# Allegro board COMPLETE SCHEMATIC V1.brd
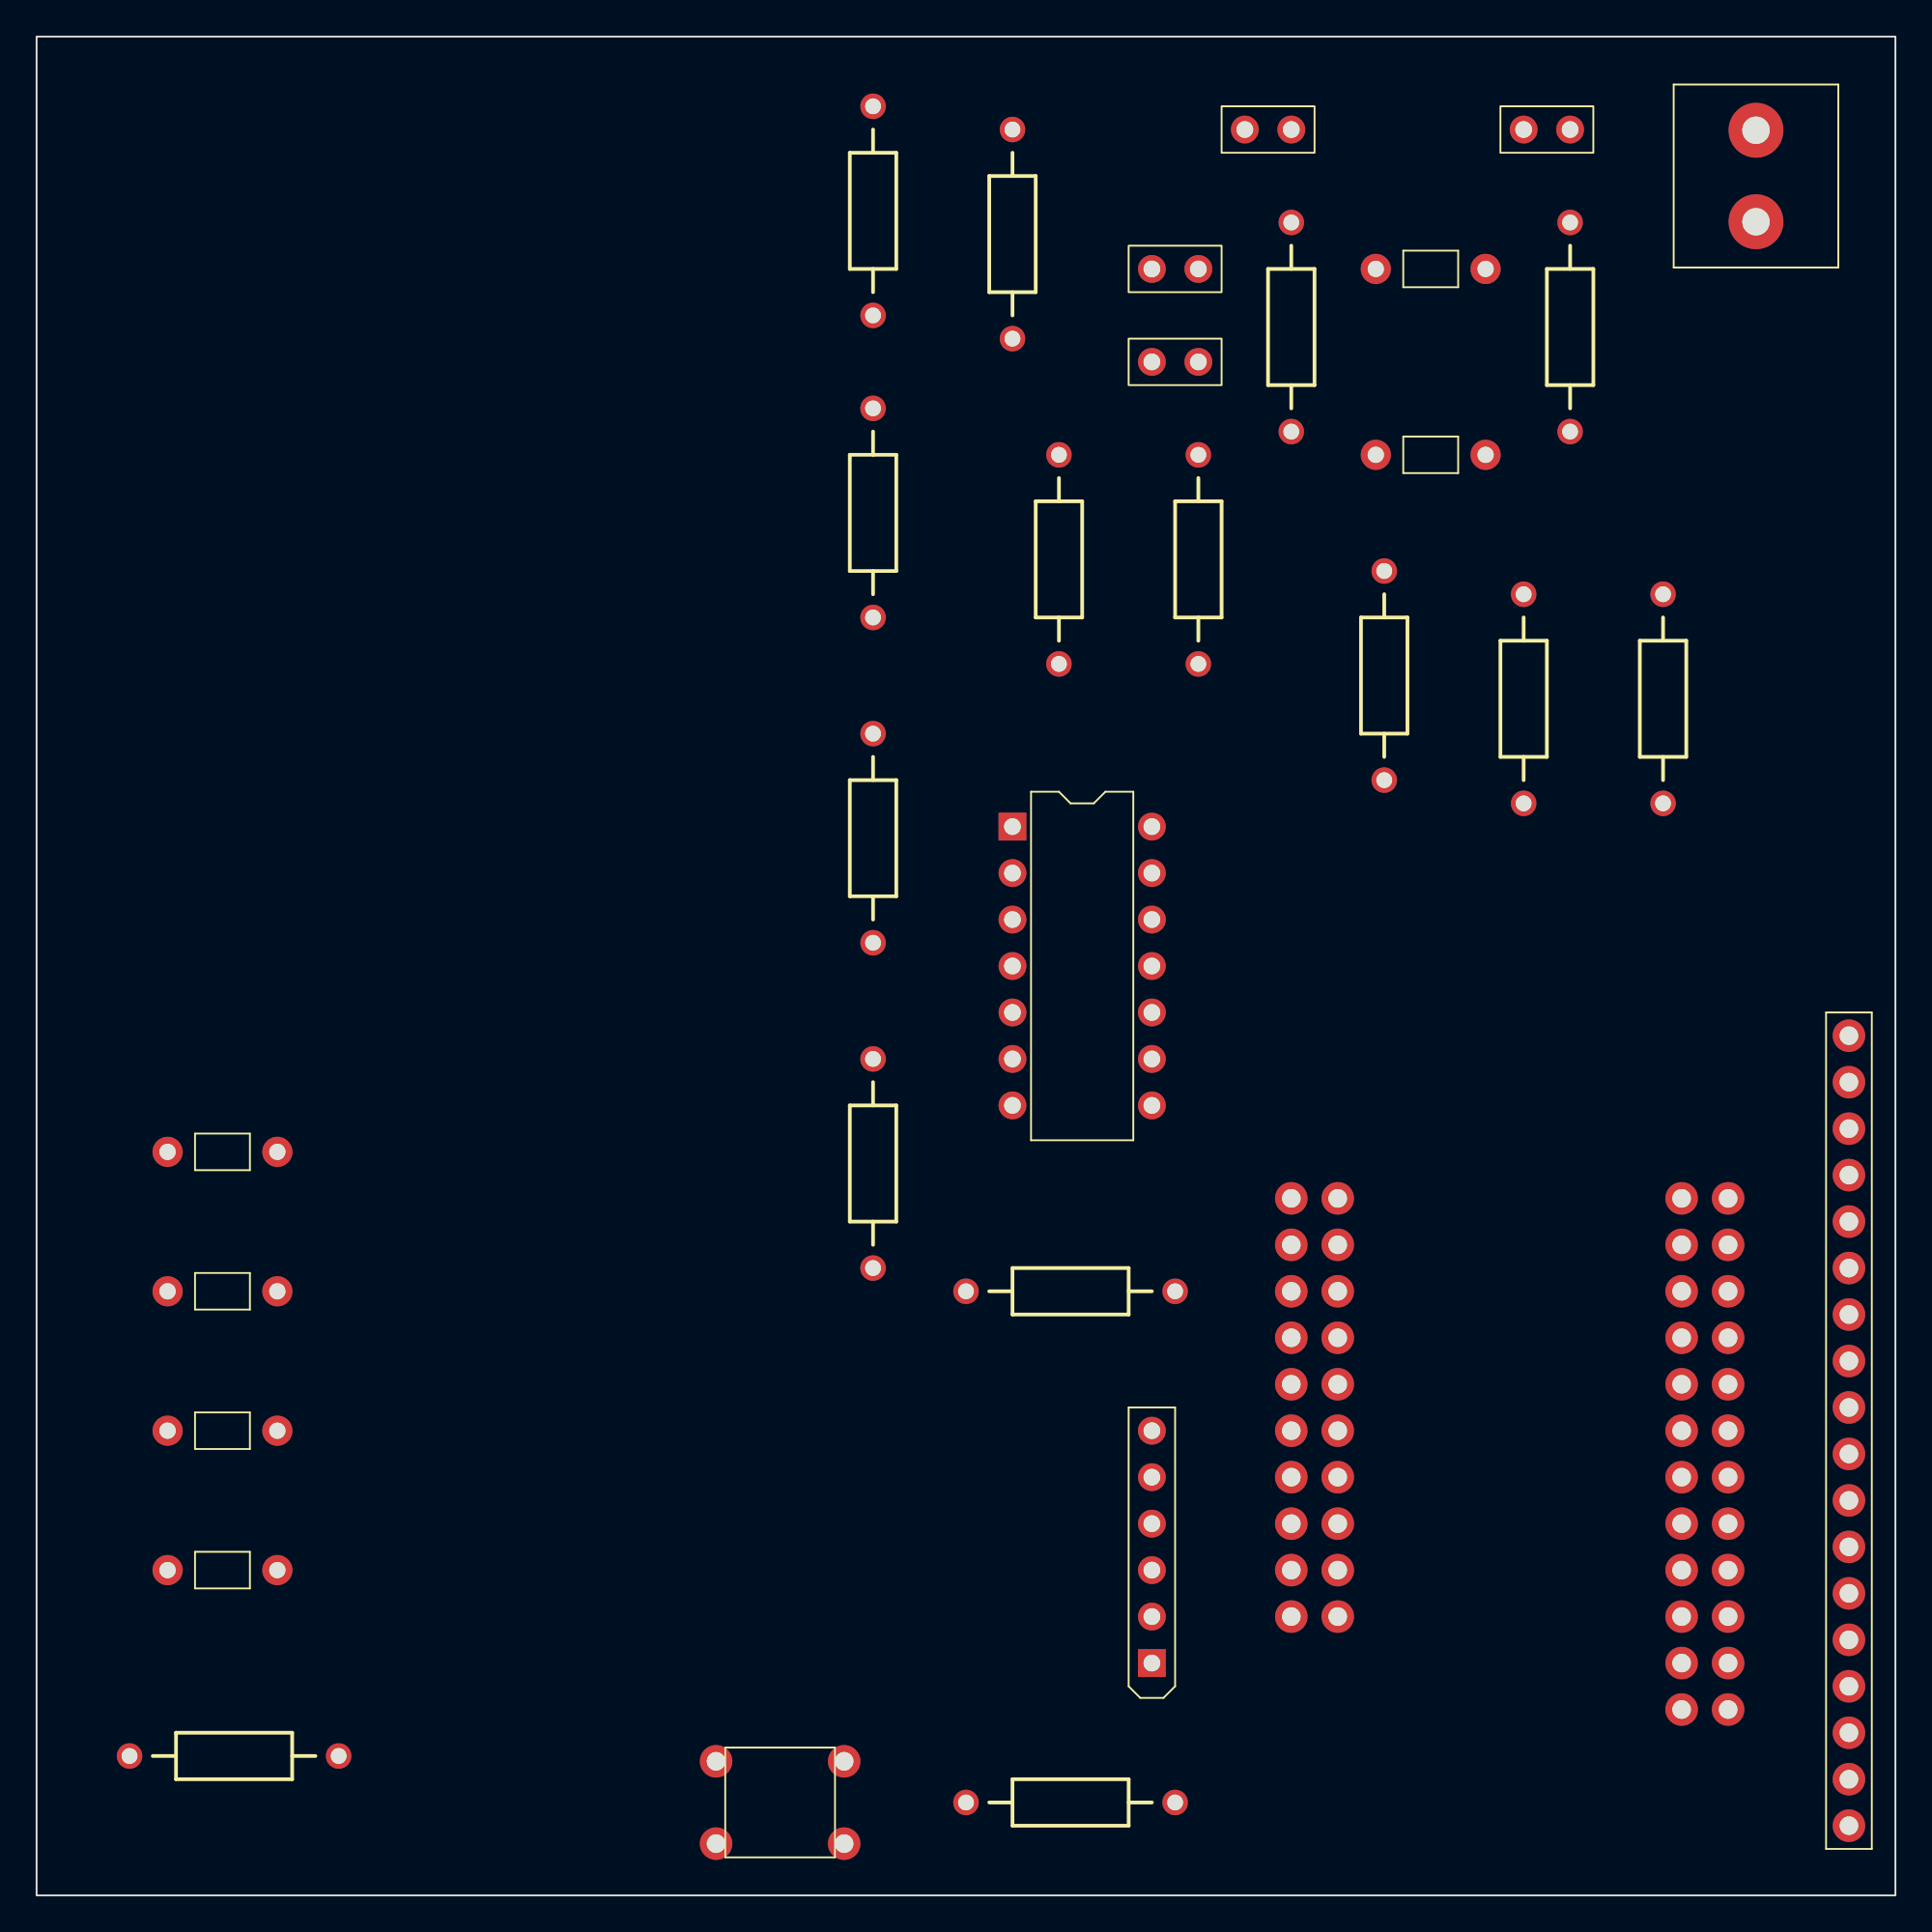
[diagram p0: board, top side]
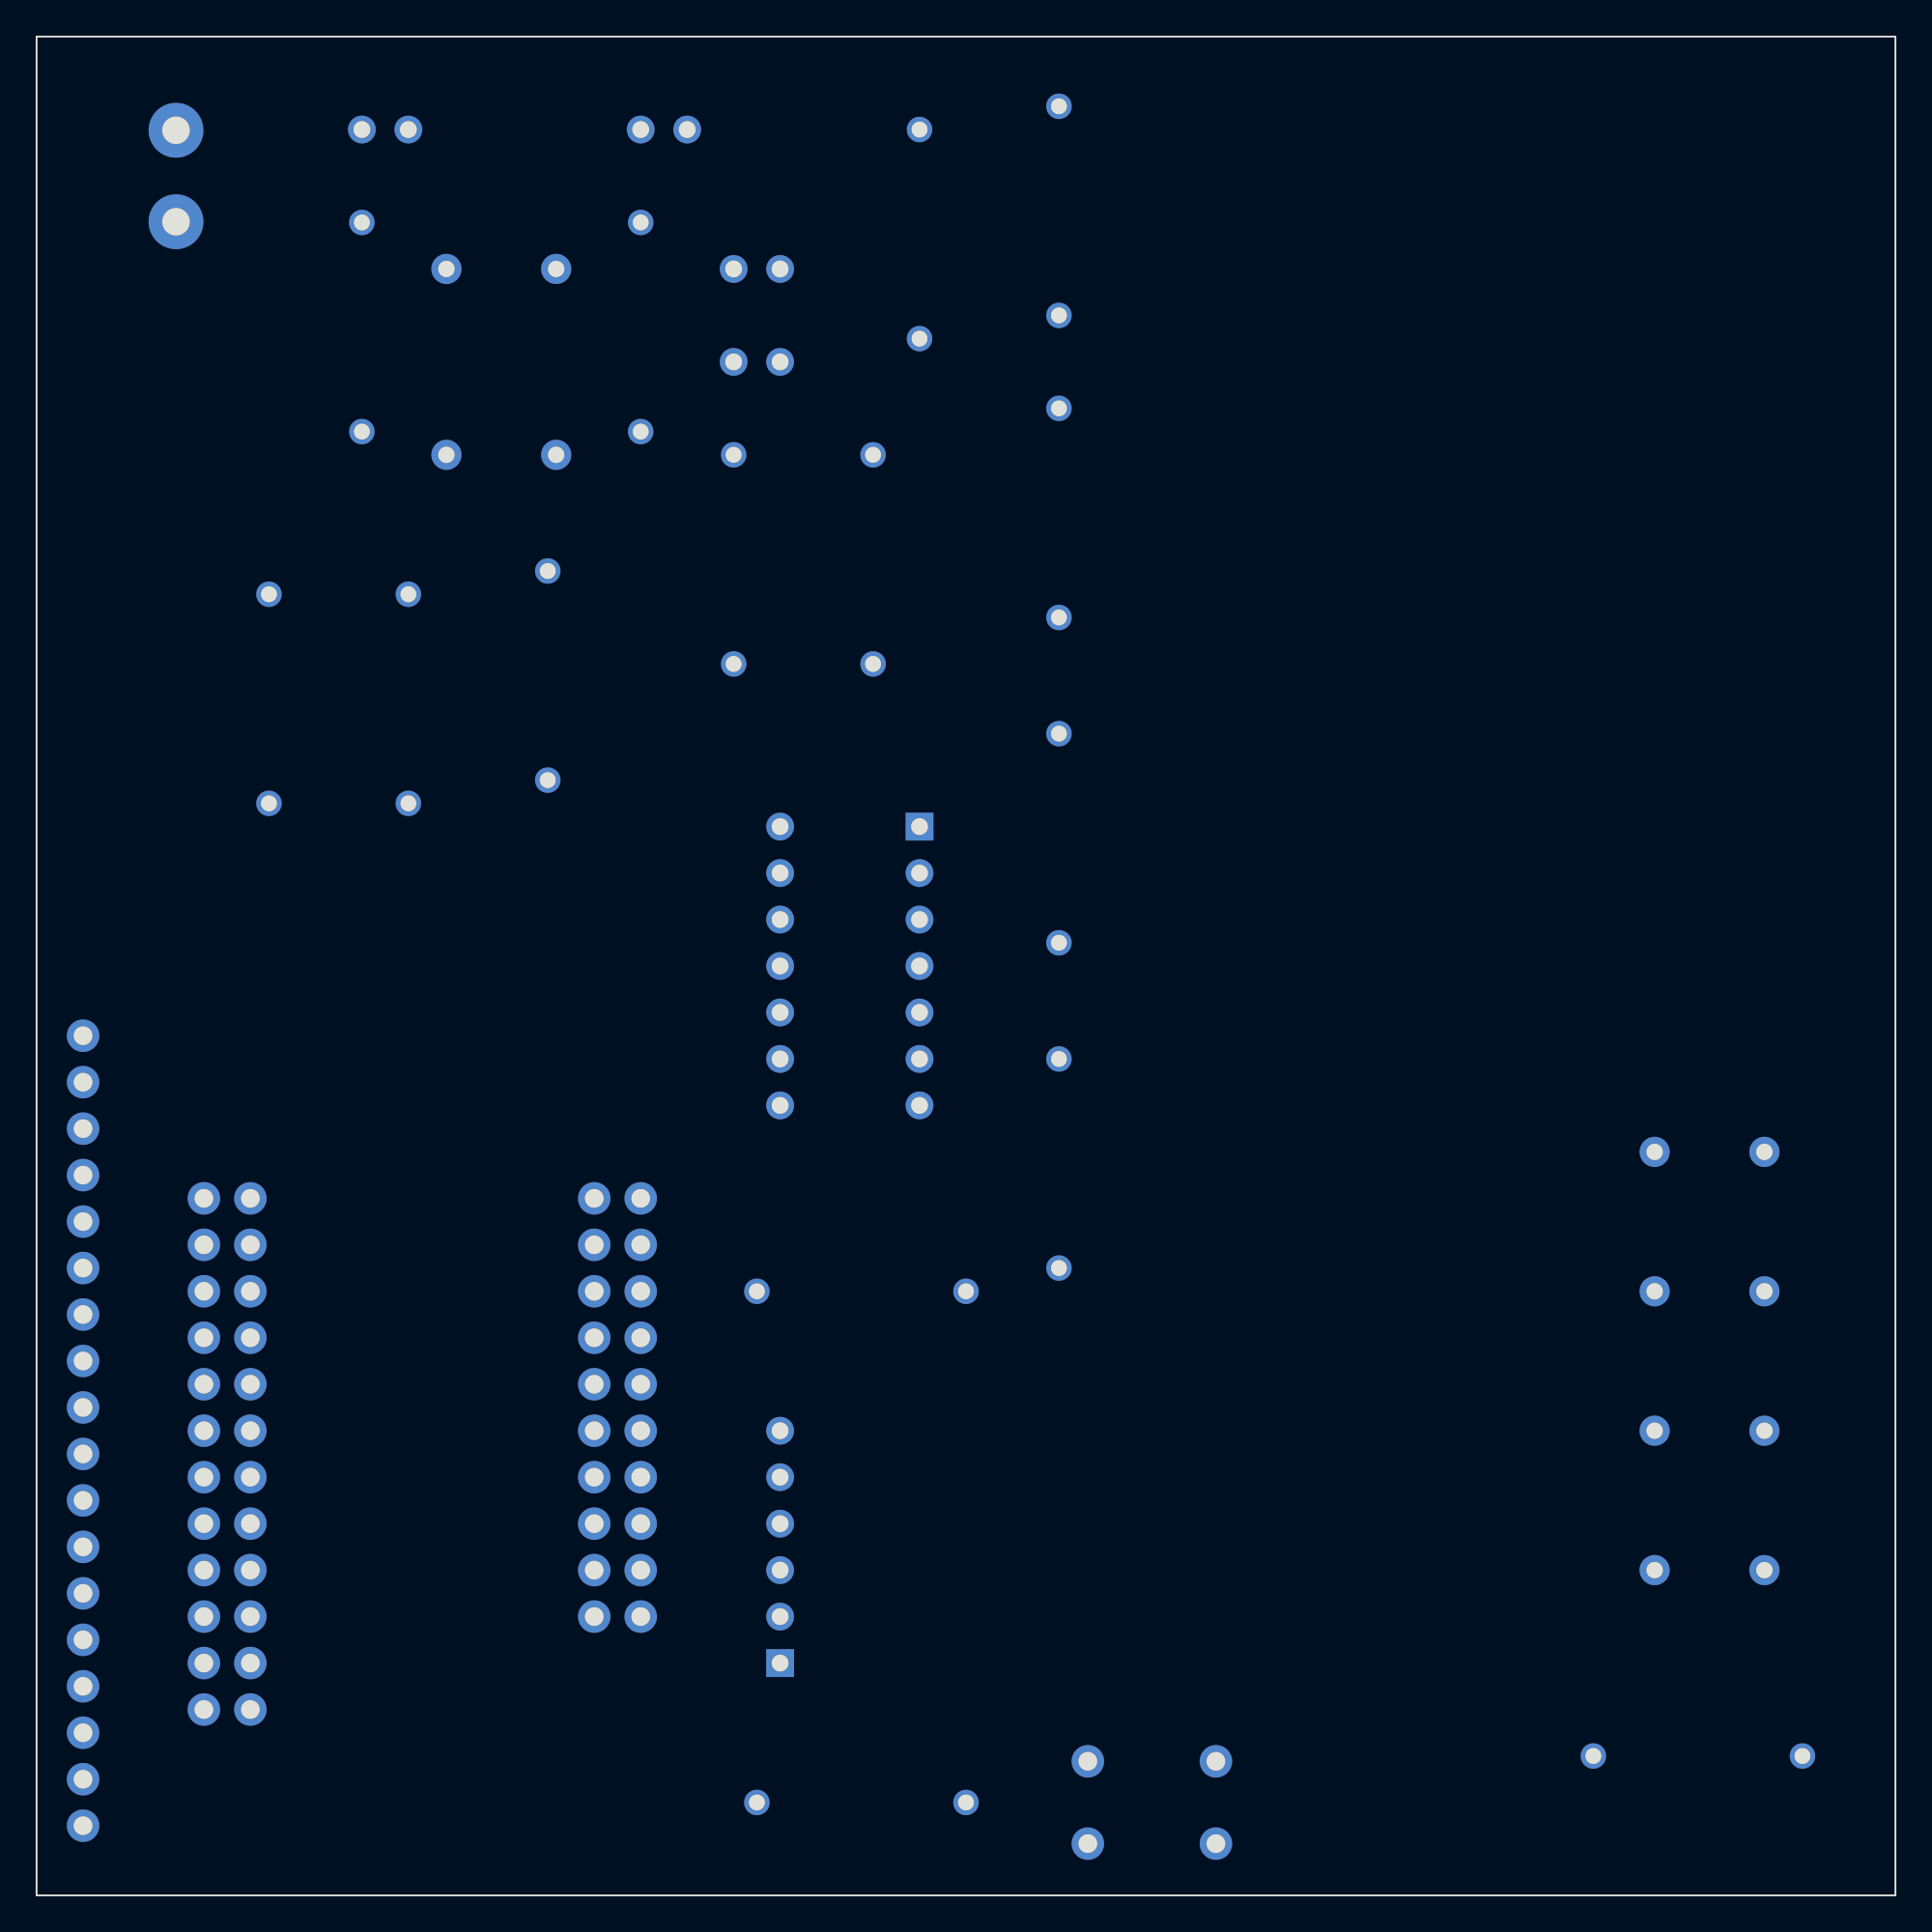
[diagram p1: board, bottom side, seen from below]

Outline 101.6 x 101.6 mm; copper layers: TOP, BOTTOM. Coordinates in mm from the lower left corner of the outline.
Outline path: rectangle 0,0 101.6,101.6

## Placement (name value [footprint] x y rotation side)
BT1  BATTERY  [2POS5MMCON]  93.98 93.98 0 top
C1  0.33uF 50V  [CAP1]  76.2 78.74 180 top
C2  0.1uF 50V  [CAP1]  10.16 40.64 0 top
C3  0.1uF 50V  [CAP1]  76.2 88.9 180 top
C4  0.1uF 50V  [CAP1]  10.16 33.02 0 top
C5  0.1 uF 50V  [CAP1]  10.16 25.4 0 top
C6  0.1uF 50V  [CAP1]  10.16 17.78 0 top
D1  BLU  [JUMPER2]  60.96 83.82 0 top
D2  GRN  [JUMPER2]  60.96 88.9 0 top
D3  1N4733A  [AXRC07]  45.72 86.36 90 top
D4  YEL  [JUMPER2]  66.04 96.52 0 top
D5  RED  [JUMPER2]  81.28 96.52 0 top
D6  1N4001  [AXRC07]  5.08 7.62 0 top
J1  HEADER 6  [SIP6]  60.96 12.7 180 top
J2  HEADER 18  [HEADER_18]  99.06 25.4 0 top
R1  200 1/4W  [AXRC07]  53.34 96.52 270 top
R2  10k 1/4W  [AXRC07]  88.9 71.12 270 top
R3  500 1/4W  [AXRC07]  63.5 78.74 270 top
R4  2k 1/4W  [AXRC07]  45.72 81.28 270 top
R5  500 1/4W  [AXRC07]  55.88 78.74 270 top
R6  1k 1/4W  [AXRC07]  45.72 63.5 270 top
R7  470 1/4W  [AXRC07]  68.58 91.44 270 top
R8  1k 1/4W  [AXRC07]  50.8 33.02 0 top
R9  470 1/4W  [AXRC07]  83.82 91.44 270 top
R10  1k 1/4W  [AXRC07]  73.66 60.96 90 top
R11  12k 1/4W  [AXRC07]  81.28 71.12 270 top
R12  5k 1/4W  [AXRC07]  45.72 45.72 270 top
R13  10k 1/4W  [AXRC07]  50.8 5.08 0 top
SW1  SW PUSHBUTTON-SPST-2  [BUTTON]  40.64 5.08 0 top
U2  LM339  [DIP14_3]  53.34 58.42 0 top
U3  PSoC4BLE  [PSOC4BLE]  68.58 38.1 0 top

## Library data of the parts
BT1 = BATTERY
C1 C2 C4-C6 = CAP NP
C3 = C_0
D1 = LED_0: User Part Number: ***
D2 D4 D5 = LED_1: User Part Number: ***
D3 = DIODE ZENER_0
D6 = DIODE_0
J1 = HEADER 6_0: User Part Number: ***
J2 = HEADER 18
R1-R13 = R
SW1 = SW PUSHBUTTON-SPST-2
U2 = LM339_1: Tolerance: ***; User Part Number: ***
U3 = PSoC4BLE_0

## Footprints (pads in the part's own frame, mm; a bottom-side part is the same pattern mirrored in y, then rotated)
2POS5MMCON
  round 3 hole 1.5: 1(0,2.5) 2(0,-2.5)
AXRC07
  round 1.397 hole 0.864: 1(0,0) 2(11.43,0)
BUTTON
  round 1.778 hole 1.016: 1(-3.5,2.25) 2(-3.5,-2.25) 3(3.5,-2.25) 4(3.5,2.25)
CAP1
  round 1.651 hole 0.889: 1(-3,0) 2(3,0)
DIP14_3
  rect 1.524x1.524 hole 0.914: 1(0,0)
  round 1.524 hole 0.914: 2(0,-2.54) 3(0,-5.08) 4(0,-7.62) 5(0,-10.16) 6(0,-12.7) 7(0,-15.24) 8(7.62,-15.24) 9(7.62,-12.7) 10(7.62,-10.16) 11(7.62,-7.62) 12(7.62,-5.08) 13(7.62,-2.54) 14(7.62,0)
HEADER_18
  round 1.778 hole 1.016: 1(0,21.59) 2(0,19.05) 3(0,16.51) 4(0,13.97) 5(0,11.43) 6(0,8.89) 7(0,6.35) 8(0,3.81) 9(0,1.27) 10(0,-1.27) 11(0,-3.81) 12(0,-6.35) 13(0,-8.89) 14(0,-11.43) 15(0,-13.97) 16(0,-16.51) 17(0,-19.05) 18(0,-21.59)
JUMPER2
  round 1.524 hole 0.914: 1(0,0) 2(2.54,0)
PSOC4BLE
  round 1.778 hole 1.016: 1(2.54,-22.86) 2(0,-22.86) 3(2.54,-20.32) 4(0,-20.32) 5(2.54,-17.78) 6(0,-17.78) 7(2.54,-15.24) 8(0,-15.24) 9(2.54,-12.7) 10(0,-12.7) 11(2.54,-10.16) 12(0,-10.16) 13(2.54,-7.62) 14(0,-7.62) 15(2.54,-5.08) 16(0,-5.08) 17(2.54,-2.54) 18(0,-2.54) 19(2.54,0) 20(0,0) 21(21.336,0) 22(23.876,0) 23(21.336,-2.54) 24(23.876,-2.54) 25(21.336,-5.08) 26(23.876,-5.08) 27(21.336,-7.62) 28(23.876,-7.62) 29(21.336,-10.16) 30(23.876,-10.16) 31(21.336,-12.7) 32(23.876,-12.7) 33(21.336,-15.24) 34(23.876,-15.24) 35(21.336,-17.78) 36(23.876,-17.78) 37(21.336,-20.32) 38(23.876,-20.32) 39(21.336,-22.86) 40(23.876,-22.86) 41(21.336,-25.4) 42(23.876,-25.4) 43(21.336,-27.94) 44(23.876,-27.94)
SIP6
  rect 1.524x1.524 hole 0.914: 1(0,0)
  round 1.524 hole 0.914: 2(0,-2.54) 3(0,-5.08) 4(0,-7.62) 5(0,-10.16) 6(0,-12.7)

## Nets
+VBAT: BT1.1(+) C1.1 C3.1 D1.1 D2.1 D4.1 D5.1 R1.1 R2.1
GND: BT1.2(-) C1.2 C2.2 C3.2 C4.2 C5.2 C6.2 D3.2(ANODE) D6.1 D6.2 J1.5(GND) R11.2 R12.2 R13.2 U2.12 U3.4(GND1) U3.21(GND2) U3.44(GND3)
+5 V: C2.1 C4.1 C5.1 C6.1 J1.6(VCC) SW1.1 U2.3 U3.2(VDDD) U3.22(VDDA) U3.43(VDDR)
RXD: J1.2(RXD) U3.11(P1.1)
TXD: J1.3(TXD) U3.12(P1.2)
N56194: R3.2 U2.1(OUT)
N56202: R5.2 U2.2(OUT)
N56210: R7.2 U2.14(OUT)
N56218: R9.2 U2.13(OUT)
N56230: D3.1(CATHODE) R1.2 R4.1
N56234: R4.2 R6.1 U2.7(+IN)
N56238: R6.2 R8.1 U2.5(+IN)
N56242: R8.2 R10.1 U2.9(+IN)
N56246: R2.2 R12.1 U2.4(-IN) U2.6(-IN) U2.8(-IN) U2.10(-IN)
N56362: R10.2 R11.1 U2.11(+IN)
N56366: D2.2 R5.1
N56370: D4.2 R7.1
N56374: D5.2 R9.1
N56918: R13.1 SW1.3 U3.15(P0.4)
N57246: J2.18 U3.42(P2.1)
N57250: J2.17 U3.41(P2.0)
N57254: J2.16 U3.40(P2.3)
N57258: J2.15 U3.39(P2.2)
N57262: J2.14 U3.38(P2.5)
N57266: J2.13 U3.37(P2.4)
N57270: J2.12 U3.36(P2.7)
N57274: J2.11 U3.35(P2.6)
N57278: J2.10 U3.34(P5.0)
N57282: J2.9 U3.33(P4.1)
N57286: J2.8 U3.32(P5.1)
N57290: J2.7 U3.31(P4.0)
N57294: J2.6 U3.30(P3.1)
N57298: J2.5 U3.29(P3.0)
N57318: J2.4 U3.28(P3.3)
N57322: J2.3 U3.27(P3.2)
N57332: J2.2 U3.26(P3.5)
N57336: J2.1 U3.25(P3.4)
N561581: D1.2 R3.1

Pads without a net: J1 1 4; SW1 2 4; U3 1 3 5 6 7 8 9 10 13 14 16 17 18 19 20 23 24
